# EAGLE board sensor_node_inner_layer (EAGLE 9.6.0)
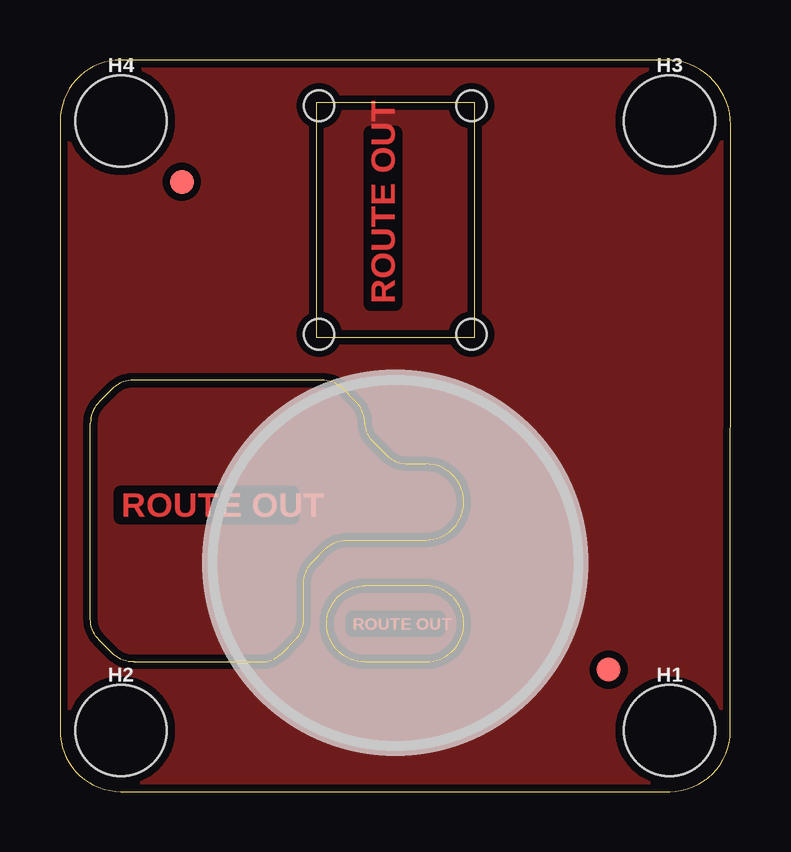
[diagram p0: board, top side]
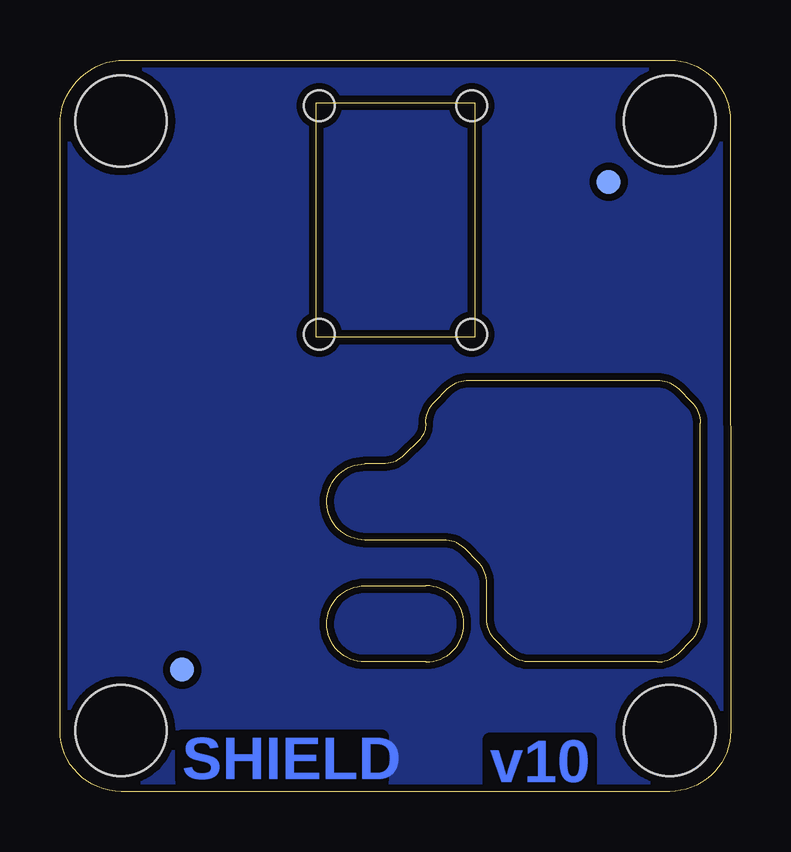
[diagram p1: board, bottom side, seen from below]

Size 27.94 x 30.48 mm. Coordinates in mm from the lower left corner, seen from the top.
Outline: 0.01,27.95 0,2.54 arc90 2.54,0 25.4,0 arc90 27.94,2.53 27.94,27.79 arc90 25.26,30.48 2.54,30.48 arc90 0.01,27.95
Outline: 10.67,28.7 10.67,18.92 17.27,18.92 17.27,28.7 10.67,28.7
Outline: 3.07,5.4 8.36,5.4 arc45 9.26,5.77 9.79,6.3 arc45 10.16,7.19 10.16,8.68 arc-45 10.53,9.58 11.06,10.11 arc-45 11.96,10.48 15.24,10.48 arc127 16.51,13.02 arc53 15.24,13.65 14.5,13.65 arc-45 13.6,14.02 13,14.62 arc-45 12.7,15.35 arc45 12.33,16.25 11.8,16.77 arc45 10.9,17.14 3.07,17.14 arc45 2.17,16.77 1.64,16.25 arc45 1.27,15.35 1.27,7.19 arc45 1.64,6.3 2.17,5.77 arc45 3.07,5.4
Outline: 15.24,8.57 12.7,8.57 arc180 12.7,5.4 15.24,5.4 arc180 15.24,8.57
Copper layers (1*16): Top 0.035mm / dielectric 1.5mm / Bottom 0.035mm
Design rules "SparkFun-2-layer-PCBWay-LIMIT": minimum track width 6mil, minimum drill 0.3mm, track to track 6mil, track to pad 6mil, pad to pad 6mil, via to via 6mil, smd to smd 6mil, copper to edge 6mil, drill to drill 6mil, minimum pad ring 6mil, minimum via ring 6mil, stop-mask expansion 4mil, vias tented up to drill 25mil, thermal gap 10mil
Holes 1.27 mm at 10.79,28.57 17.14,28.57 10.79,19.05 17.14,19.05

## Footprints (pad centres in the part's own frame; a part is rotated, then mirrored left to right if it is on the bottom)
FIDUCIAL-1X2 = smd 1 x 1: 1 0,0
STAND-OFF-#8 = hole 3.81: 0,0

## Placement (x,y rotation side)
FD1  FIDUCIAL1X2  [FIDUCIAL-1X2]  5.08,25.4 0 top
FD2  FIDUCIAL1X2  [FIDUCIAL-1X2]  22.86,5.08 0 top
FD3  FIDUCIAL1X2  [FIDUCIAL-1X2]  5.08,25.4 0 bottom
FD4  FIDUCIAL1X2  [FIDUCIAL-1X2]  22.86,5.08 0 bottom
H1  STAND-OFF  [STAND-OFF-#8]  25.4,2.54 0 top
H2  STAND-OFF  [STAND-OFF-#8]  2.54,2.54 0 top
H3  STAND-OFF  [STAND-OFF-#8]  25.4,27.94 0 top
H4  STAND-OFF  [STAND-OFF-#8]  2.54,27.94 0 top

## Library data of the parts
FD1-FD4 = SparkFun-Aesthetics
H1-H4 = standoff

## Tracks (layer width: path | path; a pad name or v marks a point on that pad's centre or on a via)
GND
  pour Bottom (isolate 0.305): 25.4,0 2.54,0 arc-90 0,2.54 0,27.94 arc-90 2.54,30.48 25.4,30.48 arc-90 27.94,27.94 27.94,2.54 arc-90
  pour Top (isolate 0.305): 25.4,0 2.54,0 arc-90 0,2.54 0,27.94 arc-90 2.54,30.48 25.4,30.48 arc-90 27.94,27.94 27.94,2.54 arc-90

## Text on the board
Top: ROUTE OUT | ROUTE OUT | ROUTE OUT
Bottom: SHIELD | v10